# Altium PCB PCB2.PcbDoc
Units mm, origin at the board's own origin, x right, y up, seen from the top; angles counter-clockwise.
Board outline 92.33 x 36.45 mm, 2 copper layers (Top Layer, Bottom Layer), stack 0.771 mm thick; 111 components, 62 nets, 321 pads, 44 vias.
Unrouted connection lines stored in the file: 106.
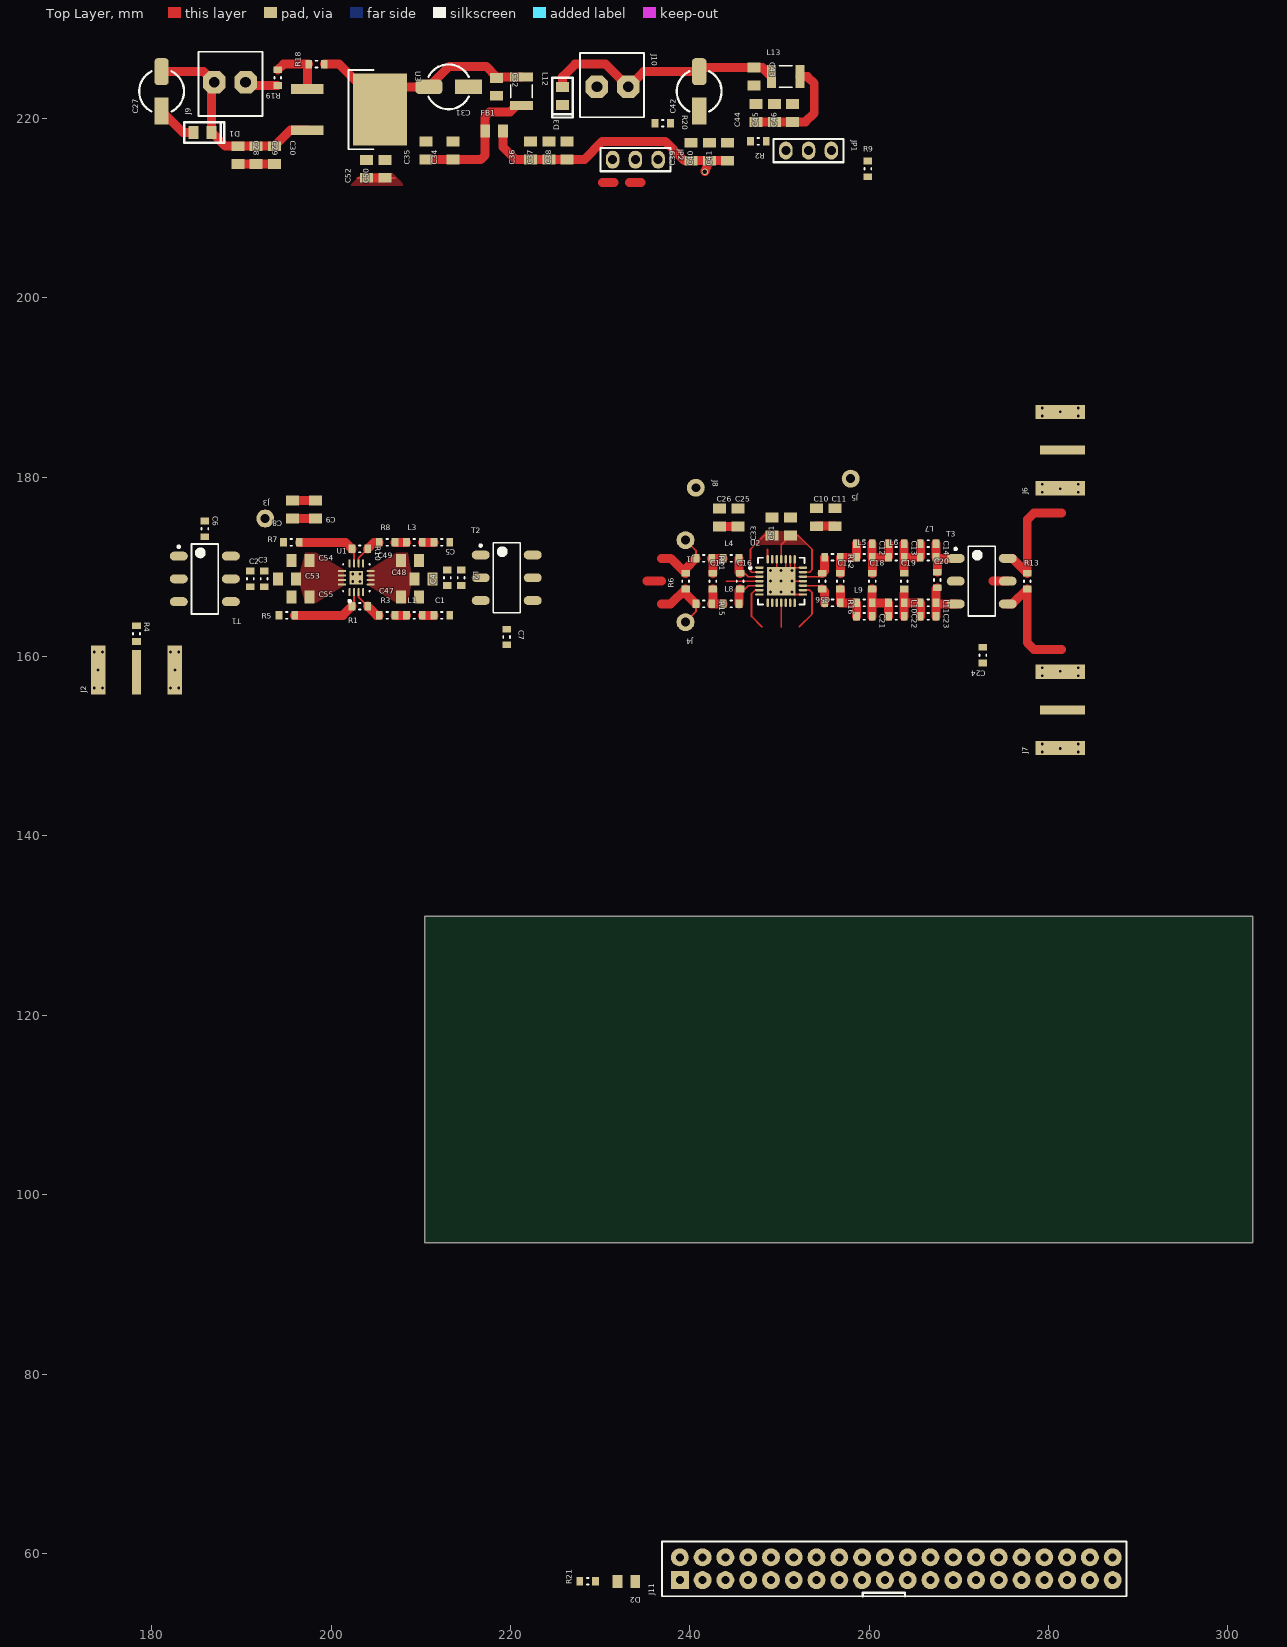
[diagram p0: Top Layer view]
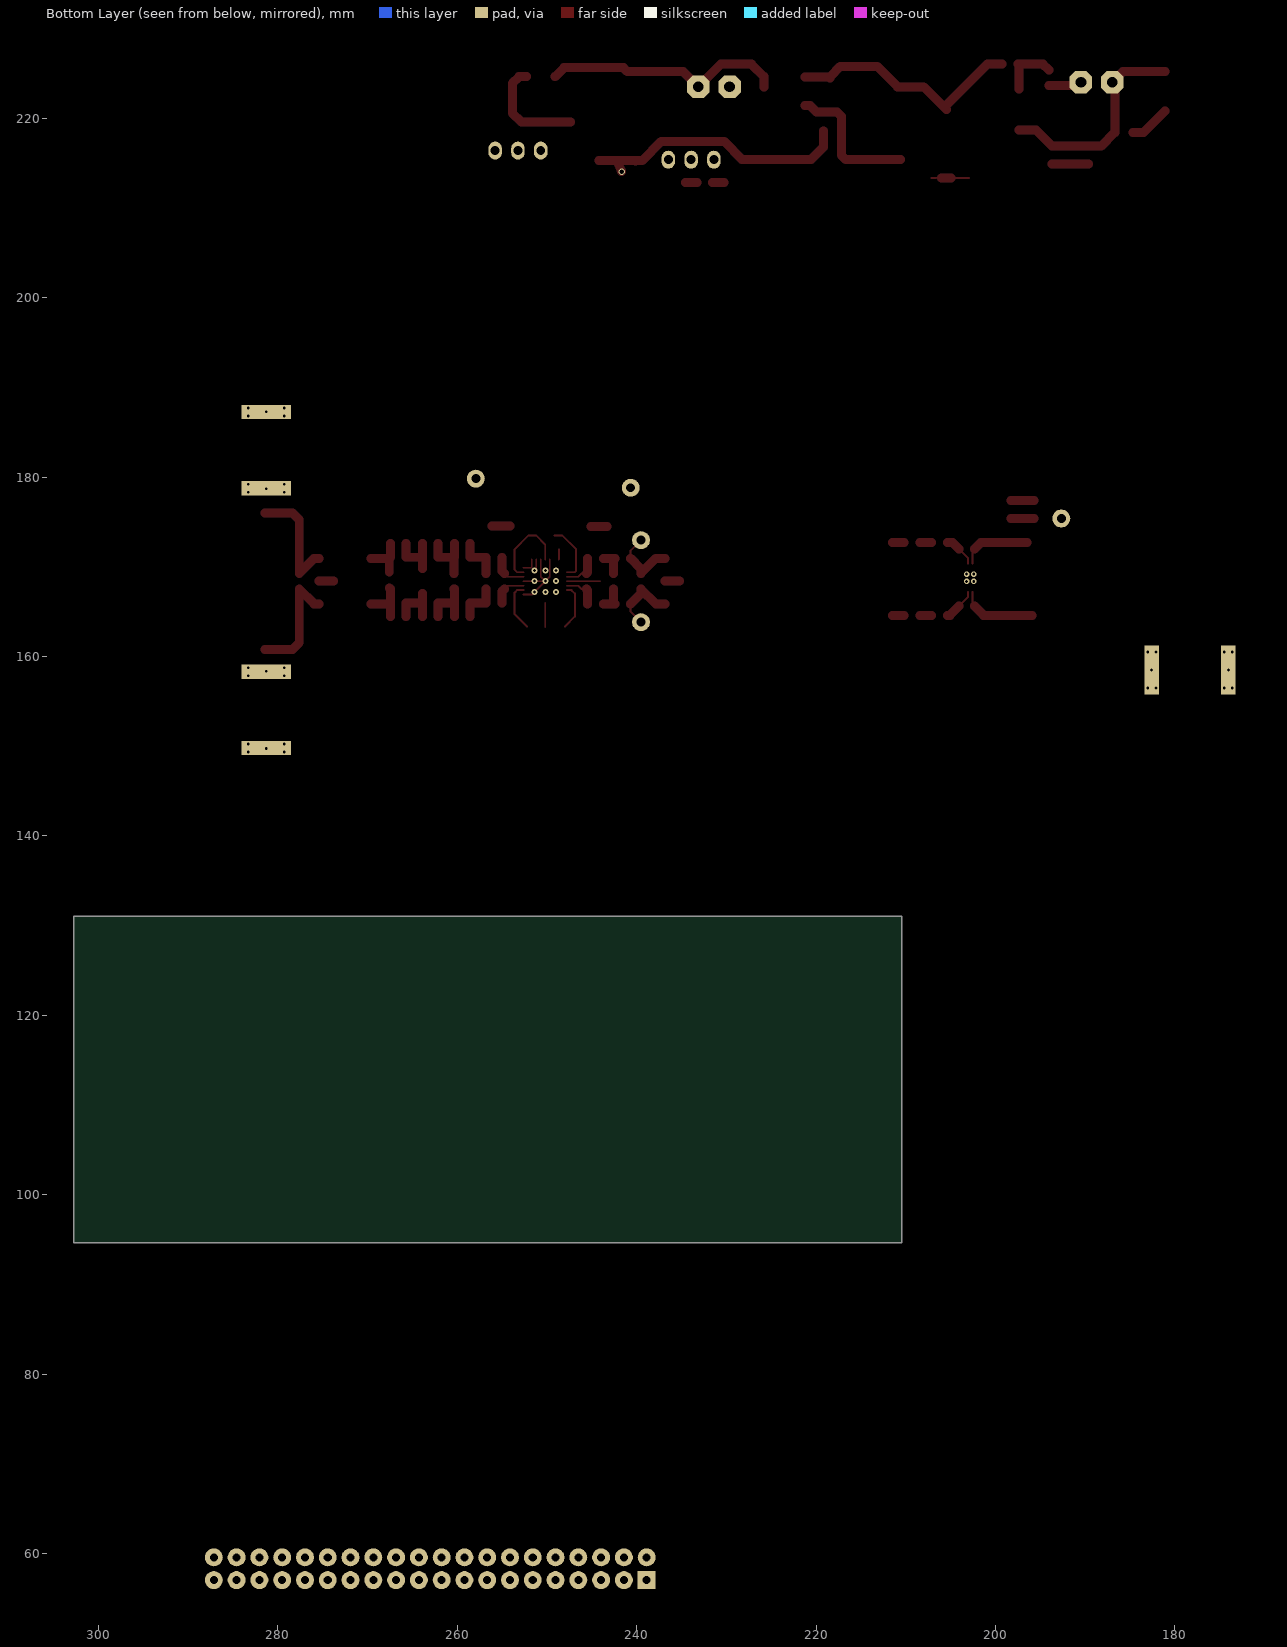
[diagram p1: Bottom Layer view, seen from below]

## Layer stack, top to bottom
Top Layer: signal copper 0.0356
Dielectric: core 0.7, FR-4, Dk 4.8
Bottom Layer: signal copper 0.0356

## Board outline
210.439,94.615 210.439,131.064 302.768,131.064 302.768,94.615

## Design rules (kind name [scope] priority, off if disabled: settings)
Clearance [All] p1: gap=0.2
PlaneClearance [All] p1: clearance=0.3
PlaneConnect [All] p1: planeconnectstyle=Direct reliefexpansion=0.508 reliefentries=4 reliefconductorwidth=150 reliefairgap=0.254
PolygonConnect [All] p1: connectstyle=Direct reliefconductorwidth=150 reliefentries=4 polygonreliefangle="90 Angle"
RoutingCorners [All] p1: cornerstyle=Round minsetback=2.54 maxsetback=2.54
RoutingVias [All] p1: holewidth=0.5 width=0.7 viastyle="Through Hole" minholewidth=0.5 minwidth=0.7 maxholewidth=0.711 maxwidth=1
SilkscreenOverComponentPads [All] p1: minsilkscreentomaskgap=0.254
SolderMaskExpansion [All] p1: expansion=0.102
Width [All] p1: maxlimit=1.5 minlimit=0.2 preferedwidth=1
24 further rules are at their usual default settings.

## Classes and differential pairs
component class Sheet_power_1: C27 C28 C29 C30 C31 C32 C33 C34 C35 C36 C37 C38 C39 C40 C41 C42 C43 C44 C45 C46 D1 D2 D3 FB1 J9 J10 J11 JP2 L12 L13 R18 R19 R20 R21 U3
component class Sheet_Amp_1: C1 C2 C3 C4 C5 C6 C7 C8 C9 C10 C11 C12 C13 C14 C15 C16 C17 C18 C19 C20 C21 C22 C23 C24 C25 C26 C47 C48 C49 C50 C51 C52 C53 C54 C55 C56 J1 J2 J3 J4 J5 J6 J7 J8 JP1 L1 L2 L3 L4 L5 L6 L7 L8 L9 L10 L11 R1 R2 R3 R4 R5 R6 R7 R8 R9 R10 R11 R12 R13 R15 R16 T1 T2 T3 U1 U2

## Components (designator, comment, footprint, x,y, rotation, side; value= is the part's Value field where it differs from the comment)
C1 "C" C_0603 212.344,164.592 r0 top
C2 "C" C_0603 191.008,168.656 r90 top
C3 "TEST" C_0603 192.532,168.656 r90 top
C4 "C" C_0603 212.979,168.783 r90 top
C5 "C" C_0603 212.344,172.72 r0 top
C6 "C" C_0603 185.928,174.244 r90 top
C7 "C" C_0603 219.583,162.179 r270 top
C8 "C" C_0805 195.707,176.403 r90 top
C9 "C" C_0805 198.247,176.403 r90 top
C10 "C" C_0805 254.127,175.53 r90 top
C11 "C" C_0805 256.159,175.53 r90 top
C12 "C" C_0603 259.461,172.593 r0 top
C13 "C" C_0603 263.017,172.593 r0 top
C14 "C" C_0603 266.573,172.593 r0 top
C15 "C" C_0603 242.57,168.402 r90 top
C16 "C" C_0603 245.618,168.402 r90 top
C17 "C" C_0603 256.794,168.402 r90 top
C18 "C" C_0603 260.35,168.402 r90 top
C19 "C" C_0603 263.906,168.402 r90 top
C20 "C" C_0603 267.589,168.529 r90 top
C21 "C" C_0603 259.461,164.465 r0 top
C22 "C" C_0603 263.017,164.465 r0 top
C23 "C" C_0603 266.573,164.465 r0 top
C24 "C" C_0603 272.669,160.147 r270 top
C25 "C" C_0805 245.364,175.514 r90 top
C26 "C" C_0805 243.332,175.514 r90 top
C27 "CPOL" "C_SMD_5.0 X 5.4" 181.102,223.012 r90 top
C28 "C" C_0805 189.611,215.9 r270 top
C29 "C" C_0805 191.643,215.9 r270 top
C30 "C" C_0805 193.675,215.9 r270 top
C31 "CPOL" "C_SMD_5.0 X 5.4" 213.106,223.52 r180 top
C32 "C" C_0805 218.44,223.52 r270 top
C33 "C" C_0805 249.174,174.498 r90 top
C34 "C" C_0805 213.614,216.408 r90 top
C35 "C" C_0805 210.566,216.408 r90 top
C36 "C" C_0805 222.25,216.408 r90 top
C37 "C" C_0805 224.282,216.408 r90 top
C38 "C" C_0805 226.314,216.408 r90 top
C39 "C" C_0805 240.157,216.281 r90 top
C40 "C" C_0805 242.189,216.281 r90 top
C41 "C" C_0805 244.221,216.281 r90 top
C42 "CPOL" "C_SMD_5.0 x 5.4" 241.046,223.012 r90 top
C43 "C" C_0805 247.142,224.663 r270 top
C44 "C" C_0805 247.396,220.599 r90 top
C45 "C" C_0805 249.428,220.599 r90 top
C46 "C" C_0805 251.46,220.599 r90 top
C47 "C" C_0805 208.788,166.624 r0 top
C48 "C" C_0805 210.312,168.656 r0 top
C49 "C" C_0805 208.788,170.688 r0 top
C50 "C" C_0805 205.994,214.376 r90 top
C51 "C" C_0805 251.206,174.498 r90 top
C52 "C" C_0805 203.962,214.376 r90 top
C53 "C" C_0805 195.072,168.656 r180 top
C54 "C" C_0805 196.596,170.688 r180 top
C55 "C" C_0805 196.596,166.624 r180 top
C56 "C" C_0603 254.762,168.402 r270 top
D1 "D" DZENER_0805 185.674,218.44 r180 top
D2 "LED" LED_0805 232.918,56.896 r180 top
D3 "D" DZENER_0805 225.806,222.504 r90 top
FB1 "Ferrita" R_0805 218.186,218.567 r0 top
J1 "TEST POINT" TEST_POINT 239.522,172.974 r180 top
J2 "Input" SMA_CONECTOR 178.308,158.496 r90 top
J3 "TEST POINT" TEST_POINT 192.659,175.387 r0 top
J4 "TEST POINT" TEST_POINT 239.522,163.83 r180 top
J5 "TEST POINT" TEST_POINT 257.937,179.832 r180 top
J6 "Output" SMA_CONECTOR 281.305,183.007 r180 top
J7 "Output" SMA_CONECTOR 281.305,154.051 r180 top
J8 "TEST POINT" TEST_POINT 240.665,178.816 r270 top
J9 "Power VS+" BORNA_PT_2 188.722,224.028 r90 top
J10 "Power VS-" BORNA_PT_2 231.394,223.52 r270 top
J11 "Header 2x20" HEADER_20X2 238.887,57.023 r90 top
JP1 "SHUNT" JUMPER_2,54_3 253.238,216.408 r0 top
JP2 "SHUNT" JUMPER_2,54_3 233.934,215.392 r0 top
L1 "L" L_0603 209.296,164.592 r0 top
L2 "TEST" L_0603 214.503,168.783 r270 top
L3 "L" L_0603 209.296,172.72 r0 top
L4 "L" L_0603 244.602,170.942 r0 top
L5 "L" L_0603 259.461,171.069 r0 top
L6 "L" L_0603 263.017,171.069 r0 top
L7 "L" L_0603 266.573,171.069 r0 top
L8 "L" L_0603 244.602,165.862 r0 top
L9 "L" L_0603 259.461,165.989 r0 top
L10 "L" L_0603 263.017,165.989 r0 top
L11 "L" L_0603 266.573,165.989 r0 top
L12 "L" L_1210 221.234,223.012 r270 top
L13 "L" L_1210 250.698,224.663 r0 top
R1 "R" R_0603 203.2,165.608 r0 top
R2 "R" R_0603 247.65,217.424 r180 top
R3 "R" R_0603 206.248,164.592 r0 top
R4 "TEST" R_0603 178.308,162.56 r90 top
R5 "R" R_0603 195.072,164.592 r0 top
R6 "TEST" R_0603 239.522,168.402 r90 top
R7 "R" R_0603 195.58,172.72 r0 top
R8 "R" R_0603 206.248,172.72 r0 top
R9 "TEST" R_0603 259.842,214.376 r90 top
R10 "R" R_0603 203.2,172 r0 top
R11 "TEST" R_0603 241.554,170.942 r0 top
R12 "R" R_0603 255.905,171.069 r0 top
R13 "TEST" R_0603 277.622,168.402 r90 top
R15 "TEST" R_0603 241.554,165.862 r0 top
R16 "R" R_0603 255.905,165.989 r0 top
R18 "R" R_0603 198.374,226.06 r180 top
R19 "R" R_0603 194.056,224.536 r270 top
R20 "R" R_0603 236.982,219.456 r0 top
R21 "R" R_0603 228.6,56.896 r180 top
T1 "Transformer_center_tab" TRASFORMADOR_2.54 185.928,168.656 r0 top
T2 "Transformer_center_tab" TRASFORMADOR_2.54 219.583,168.783 r0 top
T3 "Transformer_center_tab" TRASFORMADOR_2.54 272.542,168.402 r0 top
U1 "THS4509" QFN_16 202.819,168.783 r90 top
U2 "PGA870" QFN_28 250.19,168.402 r0 top
U3 "VOLTAGE_REGULATOR_3" REG_DPAK 203.454,220.98 r0 top

## Footprints (in the part's own frame and the unit in brackets; to place one, negate y for a bottom-side part, rotate by r counter-clockwise, add the part's x,y. Pads: shape width x height; smd on the part's side, far side on the other; paste and mask are expansions set on the pad)
BORNA_PT_2 [mm]
  oct 2.5x2.5 hole 1.2: 1(0,1.75) 2(0,-1.75)
  silkscreen extent -3.76,-3.63 3.4,3.5, body extent -3.86,-3.51 3.43,3.6, height 8.51
C_0603 [mm] "Chip Resistor, 2-Leads, Body 1.6x0.8mm, IPC Medium Density"
  rect 0.75x0.95 smd: 1(-0.875,0) 2(0.875,0)
  silkscreen extent -0.1,-0.38 0.1,0.38, body extent -0.8,-0.4 0.8,0.4, height 0.3
C_0805 [mm] "Chip Capacitor, 2-Leads, Body 2,0x1,3mm, IPC Medium Density"
  rect 1.1x1.45 smd: 1(-1,0) 2(1,0)
  body extent -1,-0.63 1,0.63, height 0.78
"C_SMD_5.0 X 5.4" [mm]
  rect 3x1.6 smd: 1(-2.2,0)
  rrect50% 3x1.6 smd: 2(2.2,0)
  silkscreen extent -2.24,-2.5 2.24,2.5, body extent -2.95,-2.67 2.95,2.63, height 5.41
"C_SMD_5.0 x 5.4" [mm]
  rect 3x1.6 smd: 1(-2.2,0)
  rrect50% 3x1.6 smd: 2(2.2,0)
  silkscreen extent -2.24,-2.5 2.24,2.5, body extent -2.95,-2.67 2.95,2.63, height 5.41
DZENER_0805 [mm]
  rect 1.1x1.45 smd: A(1,0) K(-1,0)
  silkscreen extent -2.41,-1.14 2.03,1.14, body extent -1.13,-0.64 0.87,0.57, height 1.22
HEADER_20X2 [mm]
  rect 2x2 hole 0.9: 1(0,0)
  round 2 hole 0.9: 2(2.54,0) 3(0,-2.54) 4(2.54,-2.54) 5(0,-5.08) 6(2.54,-5.08) 7(0,-7.62) 8(2.54,-7.62) 9(0,-10.16) 10(2.54,-10.16) 11(0,-12.7) 12(2.54,-12.7) 13(0,-15.24) 14(2.54,-15.24) 15(0,-17.78) 16(2.54,-17.78) 17(0,-20.32) 18(2.54,-20.32) 19(0,-22.86) 20(2.54,-22.86) 21(0,-25.4) 22(2.54,-25.4) 23(0,-27.94) 24(2.54,-27.94) 25(0,-30.48) 26(2.54,-30.48) 27(0,-33.02) 28(2.54,-33.02) 29(0,-35.56) 30(2.54,-35.56) 31(0,-38.1) 32(2.54,-38.1) 33(0,-40.64) 34(2.54,-40.64) 35(0,-43.18) 36(2.54,-43.18) 37(0,-45.72) 38(2.54,-45.72) 39(0,-48.26) 40(2.54,-48.26)
  silkscreen extent -1.8,-49.8 4.3,2
JUMPER_2,54_3 [mm]
  oval 1.5x2 hole 1: 1(-2.54,0) 2(0,0) 3(2.54,0)
  silkscreen extent -3.9,-1.3 3.9,1.3, body extent -3.8,-1.27 1.2,1.27, height 9.5
L_0603 [mm] "Chip Resistor, 2-Leads, Body 1.6x0.8mm, IPC Medium Density"
  rect 0.75x0.95 smd: 1(-0.875,0) 2(0.875,0)
  silkscreen extent -0.1,-0.38 0.1,0.38, body extent -0.8,-0.4 0.8,0.4, height 0.8
L_1210 [mm] "Chip Inductor, 2-Leads, Body 3,2x2,5mm, IPC Medium Density"
  rect 1x2.6 smd: 1(-1.6,0) 2(1.6,0)
  silkscreen extent -0.7,-1.2 0.7,1.2, body extent -1.6,-1.37 1.6,1.13, height 2.5
LED_0805 [mm]
  rect 1.1x1.45 smd: A(-1,0) K(1,0)
  body extent -1.03,-0.53 1.03,0.38, height 0.85
QFN_16 [mm] "QFN, 16-Leads, Body 2.8x2.8mm (max), Pitch 0.50mm, IPC Medium Density"
  oval 0.9x0.25 smd: 1(-1.6,0.75) 2(-1.6,0.25) 3(-1.6,-0.25) 4(-1.6,-0.75) 9(1.6,-0.75) 10(1.6,-0.25) 11(1.6,0.25) 12(1.6,0.75)
  oval 0.25x0.9 smd: 5(-0.75,-1.6) 6(-0.25,-1.6) 7(0.25,-1.6) 8(0.75,-1.6) 13(0.75,1.6) 14(0.25,1.6) 15(-0.25,1.6) 16(-0.75,1.6)
  rect 1.5x1.5 smd: 17(0,0)
  silkscreen extent -2.72,-1.53 1.53,1.52, body extent -1.54,-1.5 1.5,1.54, height 0.9
QFN_28 [mm] "QFN, 28-Leads, Body 5.2x5.2mm (max), Pitch 0.50mm, IPC Medium Density"
  oval 0.95x0.25 smd: 1(-2.425,1.5) 2(-2.425,1) 3(-2.425,0.5) 4(-2.425,0) 5(-2.425,-0.5) 6(-2.425,-1) 7(-2.425,-1.5) 15(2.425,-1.5) 16(2.425,-1) 17(2.425,-0.5) 18(2.425,0) 19(2.425,0.5) 20(2.425,1) 21(2.425,1.5)
  oval 0.25x0.95 smd: 8(-1.5,-2.425) 9(-1,-2.425) 10(-0.5,-2.425) 11(0,-2.425) 12(0.5,-2.425) 13(1,-2.425) 14(1.5,-2.425) 22(1.5,2.425) 23(1,2.425) 24(0.5,2.425) 25(0,2.425) 26(-0.5,2.425) 27(-1,2.425) 28(-1.5,2.425)
  rect 3.2x3.2 smd: 29(0,0)
  silkscreen extent -3.57,-2.6 2.6,2.6, body extent -2.52,-2.52 2.52,2.52, height 0.9
R_0603 [mm] "Chip Resistor, 2-Leads, Body 1.6x0.8mm, IPC Medium Density"
  rect 0.75x0.95 smd: 1(-0.875,0) 2(0.875,0)
  silkscreen extent -0.1,-0.38 0.1,0.38, body extent -0.8,-0.4 0.8,0.4, height 0.3
R_0805 [mm] "Chip Resistor Body 2,0x1,3mm, IPC Medium Density"
  rect 1.1x1.45 smd: 1(-1,0) 2(1,0)
  body extent -1.02,-0.64 0.98,0.62, height 0.78
REG_DPAK [mm]
  rect 3.6x1.1 smd: GND(-6.1,2.3) IN(-6.1,-2.3)
  rect 6x8 smd: OUT(2,0)
  silkscreen extent -1.5,-4.42 1.27,4.42, body extent -5.93,-3.28 4,3.26, height 2.34
SMA_CONECTOR [mm]
  rect 5x1 smd: 1(-0.25,0)
  rect 5.5x1.6 smd: 2(0,4.25) 2(0,-4.25)
  rect 5.5x1.6 smd far side: 2(0,4.25) 2(0,-4.25)
  body extent -11.53,-4.86 2.3,4.66, height 3.96
TEST_POINT [mm]
  round 2 hole 1: 1(0,0)
TRASFORMADOR_2.54 [mm] "SOP, 6-Leads, Body 7.8x5.6mm (max), Pitch 2.54mm, IPC Medium Density"
  oval 2x1 smd: 1(-2.9,2.54) 2(-2.9,0) 3(-2.9,-2.54) 4(2.9,-2.54) 5(2.9,0) 6(2.9,2.54)
  silkscreen extent -3.02,-3.9 1.5,3.9, body extent -2.8,-3.9 2.8,3.9, height 2.65

## Part data
C3: library part C
J9 J10: library part BORNA_2
L2: library part L
R4 R6 R9 R11 R13 R15: library part R

## Via types
v1: diameter 0.5, hole 0.3, Top Layer to Bottom Layer, 30 vias
v2: diameter 0.66, hole 0.33, Top Layer to Bottom Layer, tented top, 9 vias
v3: diameter 0.6, hole 0.33, Top Layer to Bottom Layer, tented top, 4 vias
v4: diameter 0.7, hole 0.5, Top Layer to Bottom Layer, 1 vias

## Nets (pads, with @x,y where several pads share a name; then routed paths per layer and width w, separated by ;. In a path a pad name is that pad's centre, name@x,y a point inside that pad or via, vN(x,y) a via of type N, cw(c..) or ccw(c..) an arc to the next point about the centre after c; other vN are vias at no path point)
AMP1+: J1.1 R6.2 R11.1 T2.6 | length 8
  Top Layer w0.2: J1.1 240.679,171.817 R11.1
  Top Layer w1: 236.834,170.942 237.857,170.942 R6.2 239.522,169.785 R11.1
AMP1-: J4.1 R6.1 R15.1 T2.4 | length 8
  Top Layer w0.2: J4.1 240.679,164.987 R15.1
  Top Layer w1: 236.834,165.862 237.857,165.862 R6.1 239.522,167.019 R15.1
B0: J11.1 U2.14
B1: J11.2 U2.13
B2: J11.3 U2.12
B3: J11.4 U2.10
B4: J11.5 U2.9
B5: J11.6 U2.8
D\I\S\A\B\L\E\: J11.9 U2.27
GND: C6.2 C7.2 C8.2 C9.2 C10.2 C11.2 C24.2 C25.2 C26.2 C27.1 C28.2 C29.2 C30.2 C31.1 C32.2 C33.2 C34.2 C35.2 C36.2 C37.2 C38.2 C39.2 C40.2 C41.2 C42.1 C43.2 C44.2 C45.2 C46.2 C47.2 C48.2 C49.2 C50.2 C51.2 C52.2 C53.2 C54.2 C55.2 D1.A D3.K J2.2 J6.2 J7.2 J9.2 J10.2 J11.12 J11.30 JP1.3 R9.2 R19.2 R20.2 R21.2 U1.17 U2.15 U2.18 U2.21 U2.22 U2.23 U2.24 U2.26 U2.29 | length 28.9
  Top Layer w0.2: U2.26 249.69,168.902 v2(250.19,168.402) ; U2.24 250.69,168.902 v2(250.19,168.402) ; U2.29@251.19,169.402 U2.23 ; U2.22 251.69,169.902 U2.21 ; U2.15 251.69,166.902 v2(250.19,168.402) ; U2.18 v2(250.19,168.402)
  Top Layer w1: C27.1 183.474,218.44 D1.A ; C28.2 C29.2 C30.2 ; J9.2 190.839,223.661 R19.2 ; C8.2 C9.2
  other v1: 279.305,149.351 283.305,149.351 281.305,149.751 279.305,150.251 283.305,150.251 173.608,156.496 174.508,156.496 182.108,156.496 183.008,156.496 279.305,157.851 283.305,157.851 281.305,158.351 174.008,158.496 182.608,158.496 279.305,158.751 283.305,158.751 173.608,160.496 174.508,160.496 182.108,160.496 183.008,160.496 279.305,178.307 283.305,178.307 281.305,178.707 279.305,179.207 283.305,179.207 279.305,186.807 283.305,186.807 281.305,187.307 279.305,187.707 283.305,187.707
  other v2: 248.99,167.202 250.19,167.202 251.39,167.202 248.99,168.402 251.39,168.402 248.99,169.602 250.19,169.602 251.39,169.602
  other v3: 202.419,168.383 203.219,168.383 202.419,169.183 203.219,169.183
LATCH: J11.8 U2.1
LED: D2.A J11.10
NetC1_1: C1.1 L1.2 | length 1.3
  Top Layer w1: L1.2 C1.1
NetC1_2: C1.2 C4.2 L2.1 T2.1
NetC2_1: C2.1 R5.1 T1.4
NetC2_2: C2.2 R7.1 T1.6
NetC3_1: C3.1 R1.1 R5.2 U1.2 | length 8.5
  Top Layer w0.2: R1.1 202.569,165.852 U1.2
  Top Layer w1: R5.2 201.309,164.592 R1.1
NetC3_2: C3.2 R7.2 R10.1 U1.11 | length 7.9
  Top Layer w0.2: R10.1 202.569,171.756 U1.11
  Top Layer w1: R7.2 201.605,172.72 R10.1
NetC4_1: C4.1 C5.2 L2.2 T2.3
NetC5_1: C5.1 L3.2 | length 2.6
  Top Layer w1: L3.2 C5.1 ; 230.237,212.852 231.535,212.852
NetC6_1: C6.1 T1.5
NetC7_1: C7.1 T2.5 | length 1.6
  Top Layer w1: 235.204,168.402 236.834,168.402
NetC8_1: C8.1 C9.1 J3.1 U1.4 U1.9 | length 2.5
  Top Layer w1: C8.1 C9.1
NetC10_1: C10.1 C11.1 J5.1 U2.28 | length 3.2
  Top Layer w0.2: 248.666,171.958 248.666,170.851 U2.28
  Top Layer w1: C10.1 C11.1
NetC12_1: C12.1 C17.2 L5.1 R12.2 | length 5.1
  Top Layer w1: C17.2 256.794,171.055 R12.2 L5.1 C12.1
NetC12_2: C12.2 C13.1 C18.2 L5.2 L6.1 | length 6.7
  Top Layer w1: C12.2 L5.2 ; C18.2 260.35,171.055 L5.2 ; C13.1 L6.1 L5.2
NetC13_2: C13.2 C14.1 C19.2 L6.2 L7.1 | length 6.1
  Top Layer w1: 263.892,169.799 L6.2 ; C13.2 L6.2 ; C14.1 L7.1 L6.2
NetC14_2: C14.2 C20.2 L7.2 T3.1 | length 5.3
  Top Layer w1: C14.2 L7.2 L7.2@267.575,170.942 ; C20.2 267.589,170.928 L7.2@267.575,170.942 ; T3.1 L7.2@267.575,170.942
NetC15_1: C15.1 L8.1 R15.2 | length 2.9
  Top Layer w1: R15.2 R15.2@242.57,166.003 ; C15.1 R15.2@242.57,166.003 ; L8.1 242.711,165.862 R15.2@242.57,166.003
NetC15_2: C15.2 L4.1 R11.2 | length 3
  Top Layer w1: C15.2 242.57,170.801 R11.2 L4.1
NetC16_1: C16.1 L8.2 U2.5 | length 3.5
  Top Layer w0.2: 246.112,167.513 246.501,167.902 U2.5
  Top Layer w1: L8.2 245.477,167.386 C16.1
NetC16_2: C16.2 L4.2 U2.3 | length 3.5
  Top Layer w0.2: 246.126,169.277 246.501,168.902 U2.3
  Top Layer w1: L4.2 245.477,169.418 C16.2
NetC17_1: C17.1 C21.1 L9.1 R16.2 | length 4.9
  Top Layer w1: C17.1 256.78,167.513 R16.2 L9.1 C21.1
NetC18_1: C18.1 C21.2 C22.1 L9.2 L10.1 | length 6.4
  Top Layer w1: C21.2 L9.2 ; C18.1 260.336,167.513 L9.2 ; C22.1 L10.1 L9.2
NetC19_1: C19.1 C22.2 C23.1 L10.2 L11.1 | length 5.9
  Top Layer w1: C22.2 L10.2 ; 263.892,167.005 L10.2 ; C23.1 L11.1 L10.2
NetC20_1: C20.1 C23.2 L11.2 T3.3 | length 5.5
  Top Layer w1: C23.2 L11.2 ; C20.1 267.448,167.513 L11.2 ; T3.3 267.575,165.862 L11.2
NetC24_1: C24.1 T3.5 | length 2
  Top Layer w1: 273.812,168.402 T3.5 T3.5@275.082,168.402
NetC25_1: C25.1 C26.1 J8.1 U2.4 | length 5.5
  Top Layer w0.2: 244.094,168.402 U2.4
  Top Layer w1: C26.1 243.348,174.498 C25.1@245.11,174.498
NetC27_2: C27.2 C28.1 C29.1 C30.1 D1.K J9.1 U3.IN | length 24.1
  Top Layer w1: C27.2 185.788,225.212 J9.1 186.674,223.73 D1.K 188.214,216.9 C28.1 C29.1 C30.1 195.455,218.68 U3.IN
NetC31_2: C31.2 C32.1 L12.1 R18.1 U3.OUT | length 26.9
  Top Layer w1: R18.1 200.914,226.06 U3.OUT@205.724,221.25 ; U3.OUT U3.OUT@205.724,221.25 ; L12.1 218.532,224.612 C32.1 218.44,224.663 217.297,225.806 213.192,225.806 C31.2 207.994,223.52 U3.OUT@205.724,221.25
NetC42_2: C42.2 C43.1 D3.A J10.1 L13.1 | length 27.4
  Top Layer w1: D3.A 225.806,224.663 227.203,226.06 230.604,226.06 J10.1 234.836,225.212 C42.2 241.497,225.663 C43.1 248.098,225.663 L13.1
NetC56_1: C56.1 R12.1 U2.19 | length 4.2
  Top Layer w0.2: U2.19 254.387,168.902 C56.1
  Top Layer w1: C56.1 255.03,169.545 R12.1
NetC56_2: C56.2 R16.1 U2.17 | length 4
  Top Layer w0.2: U2.17 254.387,167.902 C56.2
  Top Layer w1: C56.2 255.03,167.259 R16.1
NetD2_K: D2.K R21.1
NetJ2_1: J2.1 R4.1
NetJ6_1: J6.1 R13.2 T3.6 | length 13
  Top Layer w1: T3.6 275.957,170.942 R13.2 277.622,175.26 278.384,176.022 281.428,176.022
NetJ7_1: J7.1 R13.1 T3.4 | length 13
  Top Layer w1: T3.4 275.957,165.862 R13.1 277.622,161.544 278.384,160.782 281.428,160.782
NetJP1_1: JP1.1 R2.1
NetJP1_2: JP1.2 U1.12
NetJP2_1: JP2.1 R20.1
NetL1_1: L1.1 R3.2 | length 1.3
  Top Layer w1: R3.2 L1.1
NetL3_1: L3.1 R8.2 | length 2.6
  Top Layer w1: R8.2 L3.1 ; 233.285,212.852 234.583,212.852
NetR1_2: R1.2 R3.1 U1.3 | length 3.7
  Top Layer w0.2: U1.3 203.069,166.614 R1.2
  Top Layer w1: R1.2 205.091,164.592 R3.1
NetR4_2: R4.2 T1.3
NetR8_1: R8.1 R10.2 U1.10 | length 3.6
  Top Layer w0.2: U1.10 203.069,170.994 R10.2
  Top Layer w1: R10.2 204.795,172.72 R8.1
NetR9_1: R9.1 T1.1
NetR18_2: R18.2 R19.1 U3.GND | length 6.6
  Top Layer w1: R19.1 194.705,226.06 R18.2 197.354,225.915 U3.GND
STROBE: J11.7 U2.7
V+_AMP1: C36.1 C37.1 C38.1 C39.1 C40.1 C41.1 C47.1 C48.1 C49.1 FB1.2 R2.2 U1.5 U1.6 U1.7 U1.8 | length 30.5
  Top Layer w1: FB1.2 219.186,216.805 220.583,215.408 C36.1 C37.1 C38.1 228.235,215.408 230.251,217.424 237.236,217.424 239.379,215.281 C39.1 ; C39.1@240.141,215.265 C39.1 ; v4(241.681,214.052) C40.1 ; C41.1 C40.1 ; C39.1 C40.1
V+_AMP2: C33.1 C34.1 C35.1 C50.1 C51.1 C52.1 FB1.1 L12.2 U2.2 U2.6 U2.11 U2.16 U2.20 U2.25 | length 51
  Top Layer w0.2: 202.946,213.36 204.962,213.36 204.978,213.376 ; C50.1 206.629,213.376 206.645,213.36 207.137,213.36 ; U2.6 247.285,167.402 246.911,167.028 246.901,167.028 246.888,167.015 246.888,164.465 248.031,163.322 ; U2.2 246.904,169.402 246.761,169.545 246.761,171.958 248.301,173.498 C33.1 ; 250.19,163.306 U2.11 ; U2.25 250.19,172.482 C51.1 252.079,173.498 253.619,171.958 253.619,169.672 253.349,169.402 U2.20 ; 252.222,163.322 253.619,164.719 253.619,167.132 253.349,167.402 U2.16
  Top Layer w1: 204.978,213.376 C50.1 ; C35.1 C34.1@213.741,215.408 ; L12.2 220.65,221.412 219.964,220.726 217.678,220.726 217.186,220.234 FB1.1 217.17,218.551 217.17,215.9 216.678,215.408 214.63,215.408 ; 214.63,215.408 214.614,215.392 213.376,215.392 213.36,215.408 214.63,215.408
VS+_EXT: C44.1 C45.1 C46.1 JP2.3 L13.2 | length 12.1
  Top Layer w1: C44.1 C45.1 C46.1 252.873,219.599 253.873,220.599 253.873,223.901 253.111,224.663 L13.2
VS-: C53.1 C54.1 C55.1 JP2.2 U1.13 U1.14 U1.15 U1.16
pads on no net: J11.11 J11.13 J11.14 J11.15 J11.16 J11.17 J11.18 J11.19 J11.20 J11.21 J11.22 J11.23 J11.24 J11.25 J11.26 J11.27 J11.28 J11.29 J11.31 J11.32 J11.33 J11.34 J11.35 J11.36 J11.37 J11.38 J11.39 J11.40 T1.2 T2.2 T3.2 U1.1

## Polygon pours and split planes (outlines as drawn)
V+_AMP1 on Top Layer "Top Layer-No Net" (solid, pour order 1003): 204.216,169.672 207.264,171.577 208.534,171.577 209.042,168.656 208.534,165.989 207.264,165.989 204.216,167.894
VS- on Top Layer "Top Layer-No Net" (solid, pour order 1002): 197.104,171.565 198.374,171.577 201.422,169.672 201.422,167.894 198.374,165.989 197.104,165.989 196.342,168.656
V+_AMP2 on Top Layer "Top Layer-No Net" (solid, pour order 1001): 251.841,173.99 248.539,173.99 247.274,172.725 247.274,172.471 253.106,172.471 253.13,172.447 251.841,173.736 251.841,173.99
V+_AMP2 on Top Layer "Top Layer-No Net" (solid, pour order 1000): 203.327,213.868 206.629,213.868 206.883,213.868 207.645,213.106 208.013,212.738 208.013,212.484 202.07,212.484 202.052,212.466 203.327,213.741 203.327,213.868

## Silkscreen, mask and mechanical layers (free items; w line width, h text height)
Mechanical 1:
  lines w0.254: 190.754,76.2 320.167,76.2 320.167,153.797 190.754,153.797 190.754,76.2